# Altium PCB AttinyNodeNRF24TemHum.PcbDoc
Units mm, origin at the board's own origin, x right, y up, seen from the top; angles counter-clockwise.
Board outline 35.54 x 35.54 mm, 2 copper layers (Top Layer, Bottom Layer); 5 components, 10 nets, 35 pads, 0 vias.
Unrouted connection lines stored in the file: 1.
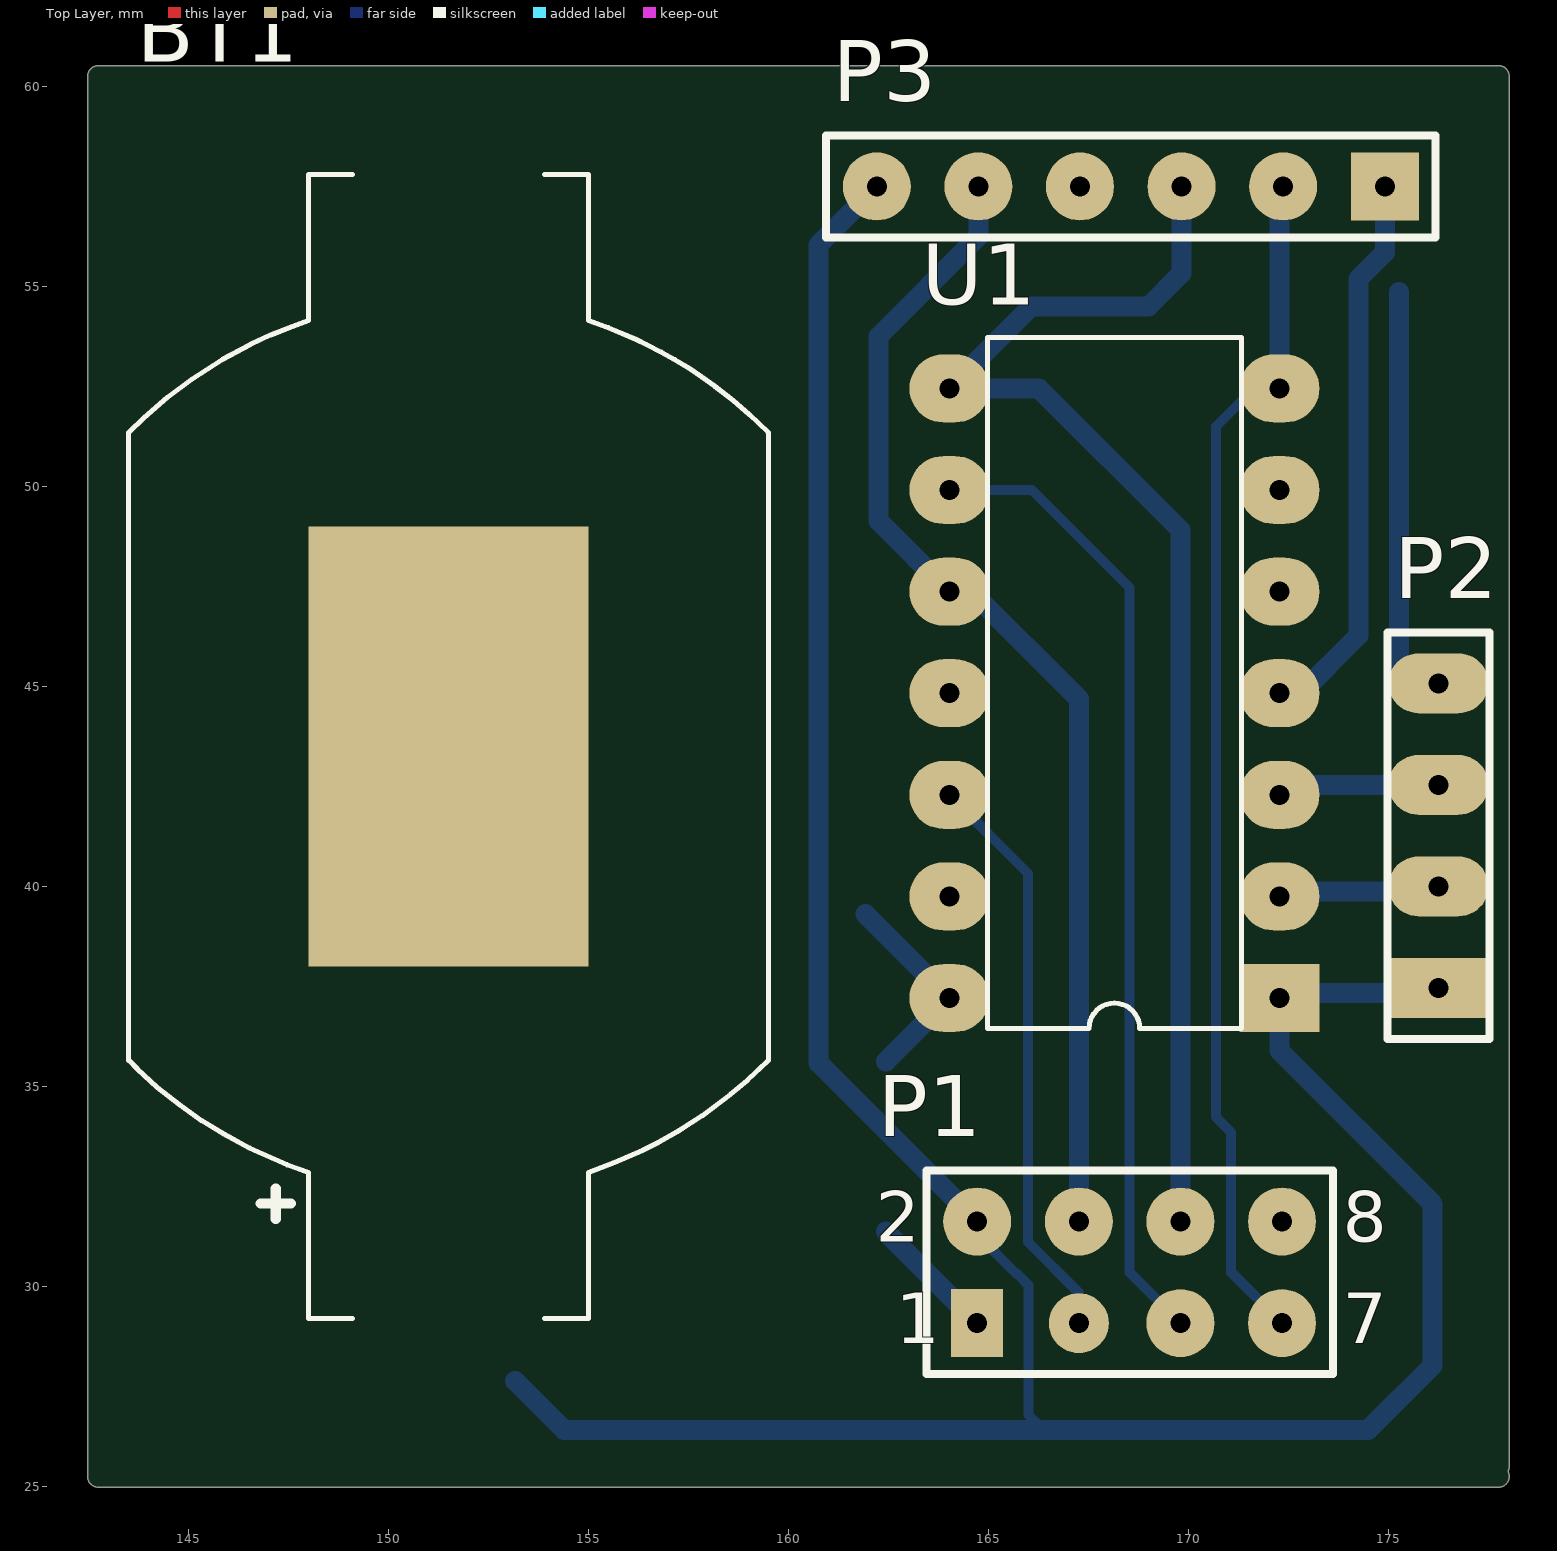
[diagram p0: Top Layer view]
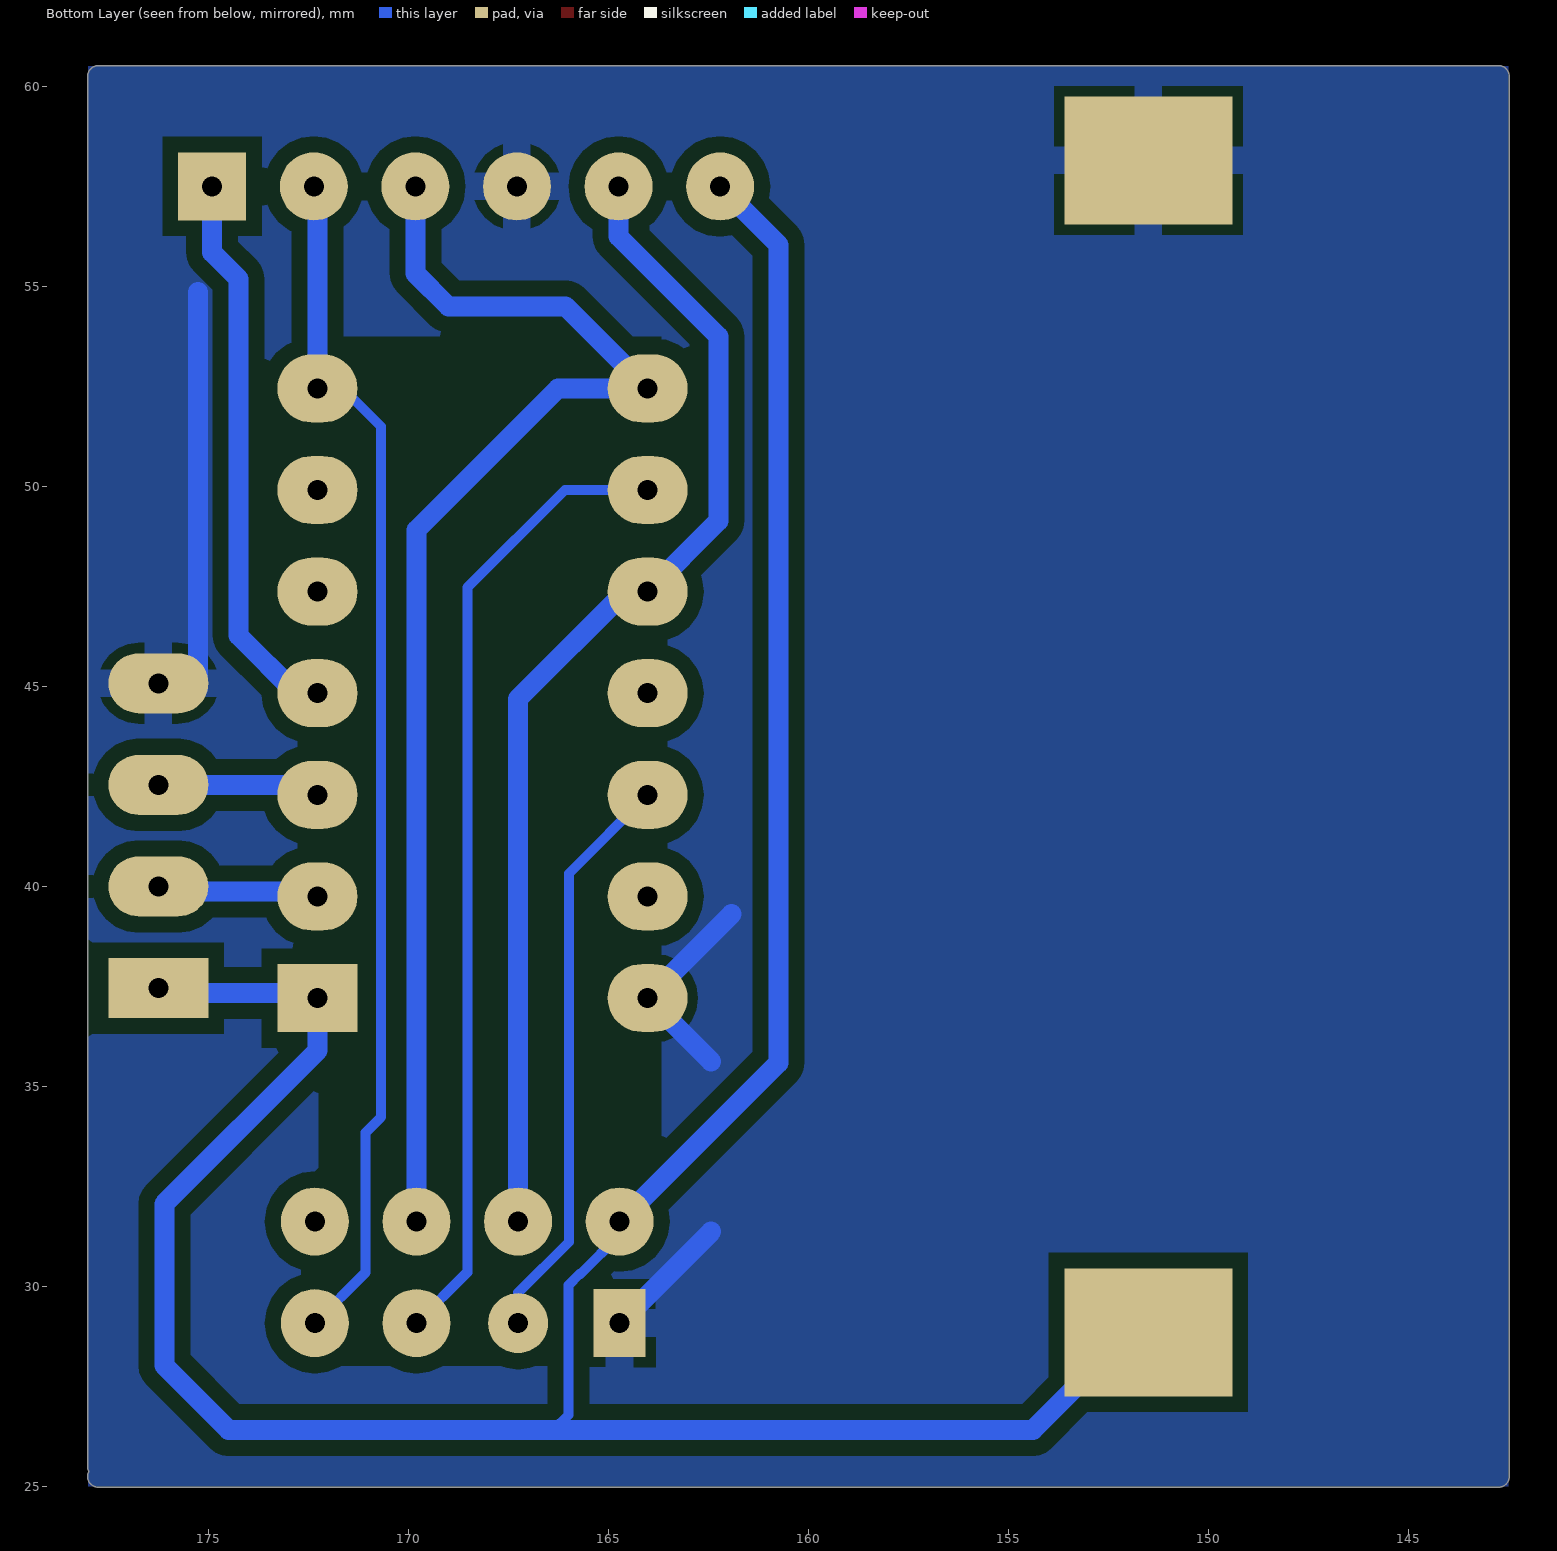
[diagram p1: Bottom Layer view, seen from below]

## Layer stack, top to bottom
Top Solder: solder mask 0.0102, Solder Resist, Dk 3.5
Top Layer: signal copper 0.0356
Dielectric 1: dielectric 0.32, FR-4, Dk 4.8
Bottom Layer: signal copper 0.0356
Bottom Solder: solder mask 0.0102, Solder Resist, Dk 3.5

## Board outline
142.48,25.25 ccw(c142.75,25.25) 142.75,24.98 177.75,24.98 ccw(c177.75,25.25) 178.02,25.25 ccw(c177.75,25.25) 177.99,25.375 ccw(c177.75,25.5) 178.02,25.5 178.02,60.25 ccw(c177.75,60.25) 177.75,60.52 142.75,60.52 ccw(c142.75,60.25) 142.48,60.25

## Design rules (kind name [scope] priority, off if disabled: settings)
Clearance Clearance_1 [InPolygon] p1: gap=0.4 ignorepadtopadclearanceinfootprint=FALSE
Clearance [All] p2: gap=0.25 ignorepadtopadclearanceinfootprint=FALSE
PolygonConnect [All] p1: connectstyle=Relief reliefconductorwidth=0.7 reliefentries=4 polygonreliefangle="90 Angle" airgapwidth=0.254
RoutingVias [All] p1: holewidth=0.711 width=1.27 viastyle="Through Hole" minholewidth=0.711 minwidth=1.27 maxholewidth=0.711 maxwidth=1.27
SolderMaskExpansion [All] p1: expansion=0.102
Width [All] p1: maxlimit=0.5 minlimit=0.1 preferedwidth=0.5 toplayer_minwidth=0.5 minimp=50.000000 maximp=50.000000 favimp=50.000000
30 further rules are at their usual default settings.

## Components (designator, comment, footprint, x,y, rotation, side; value= is the part's Value field where it differs from the comment)
BT1 "Holder Cr2032 Gold Leads Smd" "CR2032 Holder _ \"White\"" 151.5,43.5 r90 top
P1 "Header 4X2" HDR2X4 164.719,29.083 r0 top
P2 "sensor In" HDR1X4 176.25,37.46 r90 top
P3 "ICSP" HDR1X6 174.907,57.5 r180 top
U1 "MCU-ATTINY84-20PU(DIP14)" *DIP14-2.54-17.24X6.35MM 168.148,44.831 r90 top

## Footprints (in the part's own frame and the unit in brackets; to place one, negate y for a bottom-side part, rotate by r counter-clockwise, add the part's x,y. Pads: shape width x height; smd on the part's side, far side on the other; paste and mask are expansions set on the pad)
*DIP14-2.54-17.24X6.35MM [mm]
  rect 1.7x2 hole 0.5: 1(-7.62,-4.128)
  oval 1.7x2 hole 0.5: 2(-5.08,-4.127) 3(-2.54,-4.127) 4(0,-4.127) 5(2.54,-4.127) 6(5.08,-4.127) 7(7.62,-4.127) 8(7.62,4.128) 9(5.08,4.127) 10(2.54,4.127) 11(0,4.127) 12(-2.54,4.127) 13(-5.08,4.127) 14(-7.62,4.127)
  silkscreen extent -8.38,-3.18 8.89,3.18
"CR2032 Holder _ \"White\"" [mm]
  rect 3.2x4.2 smd far side: 1(-14.65,0) 2(14.65,0)
  rect 11x7 smd: 3(0,0)
  silkscreen extent -14.3,-8 14.3,8, body extent -16.1,-8 16.1,8, height 5.6
HDR1X4 [mm] "Connector; Header; 4 Position"
  rect 1.5x2.5 hole 0.5: 1(0,0)
  oval 1.5x2.5 hole 0.5: 2(2.54,0) 3(5.08,0) 4(7.62,0)
  silkscreen extent -1.27,-1.27 8.89,1.27
HDR1X6 [mm] "Connector; Header; 6 Position"
  rect 1.7x1.7 hole 0.5: 1(0,0)
  round 1.7 hole 0.5: 2(2.54,0) 3(5.08,0) 4(7.62,0) 5(10.16,0) 6(12.7,0)
  silkscreen extent -1.27,-1.27 13.97,1.27
HDR2X4 [mm] "Connector; Header; 4x2 Position"
  rect 1.3x1.7 hole 0.5: 1(0,0)
  round 1.7 hole 0.5: 2(0,2.54) 4(2.54,2.54) 5(5.08,0) 6(5.08,2.54) 7(7.62,0) 8(7.62,2.54)
  round 1.5 hole 0.5: 3(2.54,0)
  silkscreen extent -1.27,-1.27 8.89,3.81

## Part data
BT1: library part BU2032SM-BT-GTR, Package=None, Availability=Good, MF=MPD, MP=BU2032SM-BT-GTR, Price="0.64 USD"
P1: "Header, 4-Pin, Dual row", LatestRevisionDate=17-Jul-2002, LatestRevisionNote="Re-released for DXP Platform.", Publisher="Altium Limited"
P2: library part "Header 4", "Header, 4-Pin", LatestRevisionDate=17-Jul-2002, LatestRevisionNote="Re-released for DXP Platform.", Publisher="Altium Limited"
P3: library part "Header 6", "Header, 6-Pin", LatestRevisionDate=17-Jul-2002, LatestRevisionNote="Re-released for DXP Platform.", Publisher="Altium Limited"
U1: "MCU 8-Bit ATtiny AVR RISC 8KB Flash 3.3V/5V 14-Pin PDIP", Package="DIP-14 Microchip", Availability=Unavailable, MF=Microchip, MP=ATTINY84-20PU, Price=None, SnapEDA_Link=https://www.snapeda.com/parts/ATTINY84-20PU/Microchip/view-part/?ref=snap

## Nets (pads, with @x,y where several pads share a name; then routed paths per layer and width w, separated by ;. In a path a pad name is that pad's centre, name@x,y a point inside that pad or via, vN(x,y) a via of type N, cw(c..) or ccw(c..) an arc to the next point about the centre after c; other vN are vias at no path point)
AUX: P2.3 U1.3 | length 4.1
  Bottom Layer w0.5: U1.3 172.524,42.54 P2.3
CE: P1.3 U1.12 | length 14.5
  Bottom Layer w0.25: U1.12 165.989,40.322 165.989,31.115 167.259,29.845 P1.3
CSN: P1.4 P3.5 U1.10 | length 29.3
  Bottom Layer w0.5: P3.5 164.747,56.247 162.25,53.75 162.25,49.141 U1.10 164.578,47.371 167.259,44.69 P1.4
DATA: P2.2 U1.2 | length 3.5
  Bottom Layer w0.5: U1.2 172.403,39.878 P2.2@175.75,39.878
GND: BT1.2 P1.1 P2.4 P3.4 U1.14 | length 18.3
  Bottom Layer w0.5: 161.925,39.306 U1.14 162.433,35.623 ; 162.433,31.369 P1.1 ; P2.4@175.26,44.958 175.26,54.864
MISO: P1.7 P3.2 U1.7 | length 30.2
  Bottom Layer w0.25: U1.7 171.639,52.451 170.688,51.5 170.688,34.231 171.069,33.85 171.069,30.353 P1.7 ; P3.2@172.275,57.408 P3.2
  Bottom Layer w0.5: U1.7 P3.2@172.275,57.408
MOSI: P1.6 P3.3 U1.8 | length 33.7
  Bottom Layer w0.5: P1.6 169.799,48.912 166.26,52.451 U1.8 166.07,54.5 169,54.5 169.827,55.327 P3.3
RESET: P3.1 U1.4 | length 14.1
  Bottom Layer w0.5: U1.4 172.807,44.831 174.25,46.274 174.25,55.192 174.907,55.849 P3.1
SCK: P1.5 U1.9 | length 24.4
  Bottom Layer w0.25: U1.9 166.089,49.911 168.529,47.471 168.529,30.353 P1.5
VCC: BT1.1 P1.2 P2.1 P3.6 U1.1 | length 72.4
  Bottom Layer w0.25: P1.2@164.719,31.29 165.701,30.308 165.724,30.308 166,30.032 166,26.786 166.37,26.416
  Bottom Layer w0.5: BT1.1@153.162,27.641 154.387,26.416 166.37,26.416 174.498,26.416 176.105,28.023 176.105,32.065 172.275,35.895 U1.1 172.403,37.338 P2.1@175.75,37.338 ; P3.6 160.75,56.043 160.75,35.592 P1.2 P1.2@164.719,31.29
pads on no net: BT1.3 P1.8 U1.5 U1.6 U1.11 U1.13

## Polygon pours and split planes (outlines as drawn)
no net on Bottom Layer "Bottom Layer-No Net" (solid, pour order 2): 173.259,56.608
GND on Bottom Layer "Bottom Layer-GND" (solid, pour order 0): 142.5,60.5 178,60.5 178,25 142.5,25

## Other copper
Bottom Layer:
  pour cut-out: 163.672,53.75 172.25,53.75 172.25,28.011 165.759,28.011 165.759,30.25 163.672,31.623

## Silkscreen, mask and mechanical layers (free items; w line width, h text height)
Mechanical 1:
  lines w0.54: 177.75,25.25 142.75,25.25 142.75,60.25 177.75,60.25 177.75,25.5

## Text inside footprints (layer, text, board x,y; h text height)
P1: Top Overlay "2" at 162.179,31.115 h1.27; Top Overlay "1" at 162.687,28.575 h1.27; Top Overlay "7" at 173.863,28.575 h1.27; Top Overlay "8" at 173.863,31.115 h1.27